# EAGLE board LP-LED-panelized (EAGLE 6.4)
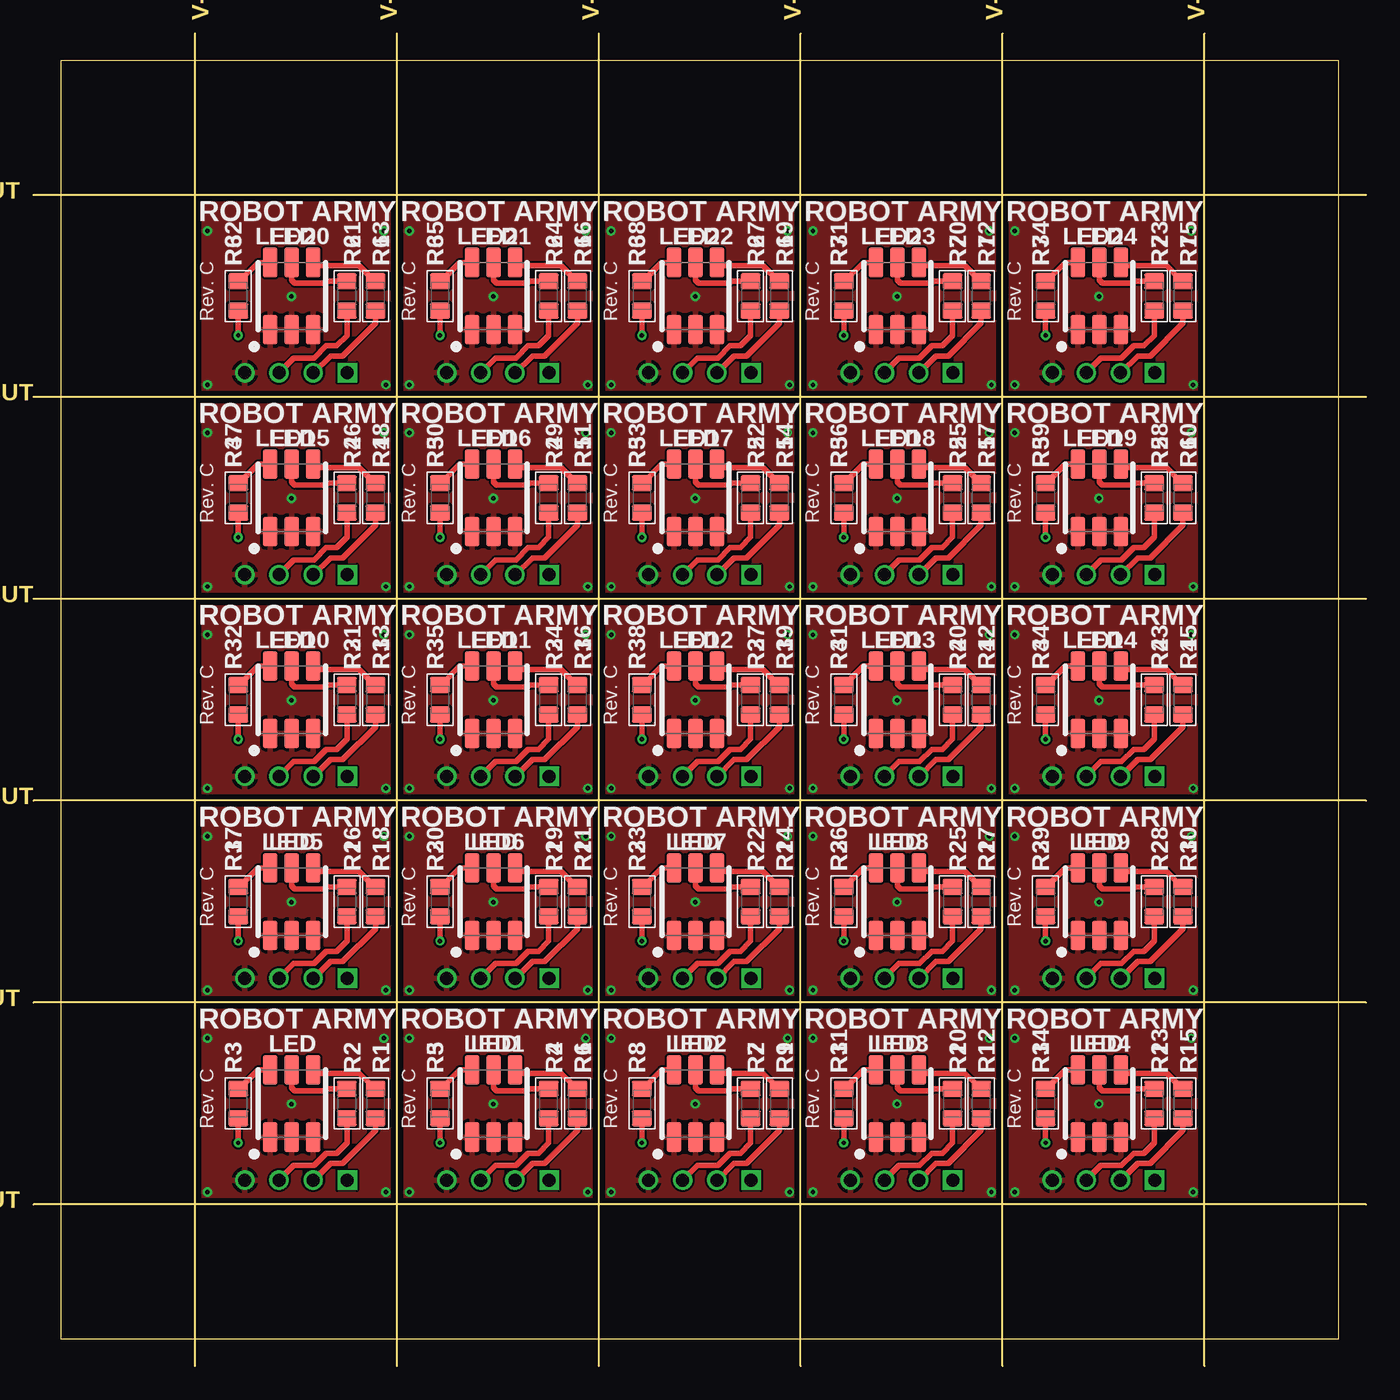
[diagram p0: board, top side]
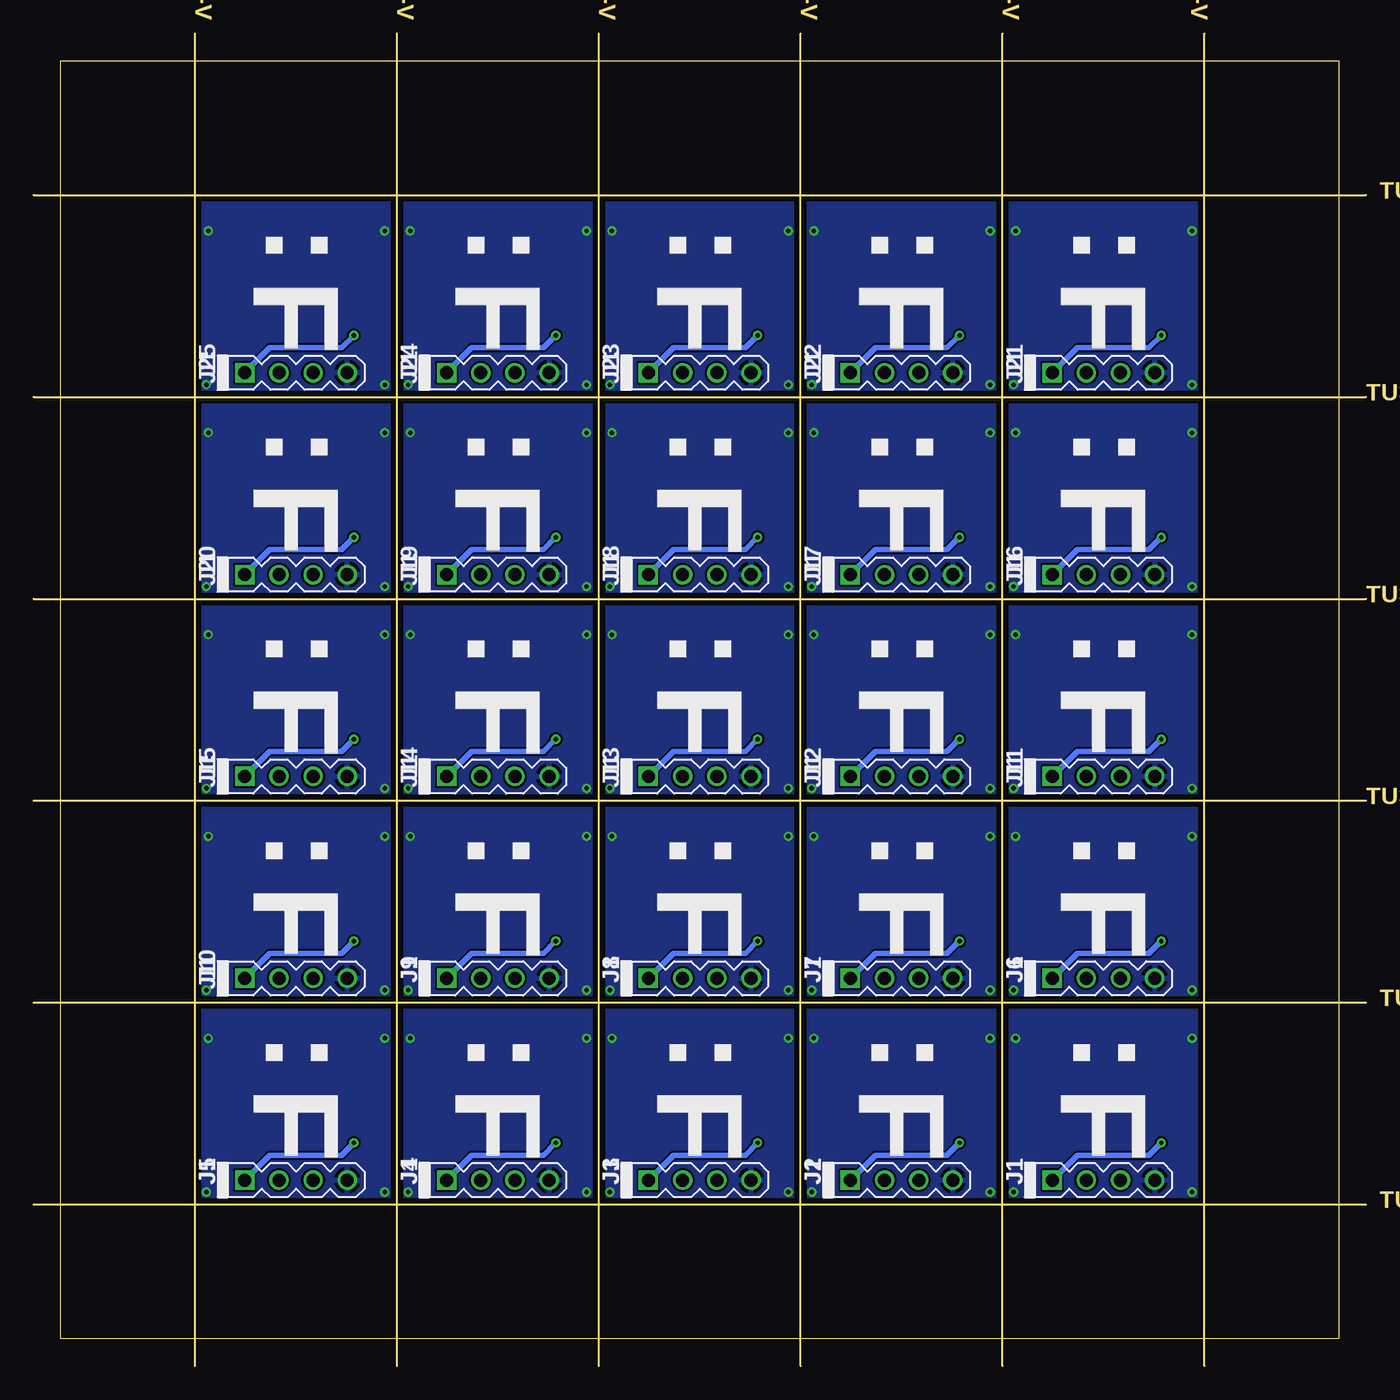
[diagram p1: board, bottom side, seen from below]

Size 99 x 99 mm. Coordinates in mm from the lower left corner, seen from the top.
Outline: 27,0 27,99
Outline: 42,0 42,99
Outline: 57,0 57,99
Outline: 72,0 72,99
Outline: 99,27 0,27
Outline: 99,42 0,42
Outline: 99,57 0,57
Outline: 99,72 0,72
Outline: 12,0 12,99
Outline: 87,0 87,99
Outline: 99,87 0,87
Outline: 99,12 0,12
Outline: 2,2 97,2 97,97 2,97 2,2
Copper layers (1*16): Top 0.0356mm / dielectric 1.5011mm / Bottom 0.0356mm
Design rules "OSH-CircuitMonkey": minimum track width 6mil, minimum drill 13mil, track to track 6mil, track to pad 6mil, pad to pad 6mil, via to via 6mil, smd to smd 6mil, copper to edge 15mil, drill to drill 6mil, minimum pad ring 7mil, minimum via ring 7mil, stop-mask expansion 3mil, vias tented up to drill 13mil, thermal gap 10mil

## Footprints (pad centres in the part's own frame; a part is rotated, then mirrored left to right if it is on the bottom)
MA04-1 = drill 0.965 square: 1 -3.81,0 | drill 0.965: 2 -1.27,0; 3 1.27,0; 4 3.81,0
PLCC-6 = smd 2.184 x 1.067: 1 -2.5,1.6; 2 -2.5,0; 3 -2.5,-1.6; 4 2.5,-1.6; 5 2.5,0; 6 2.5,1.6
0805 = smd 1.2 x 1.5: 1 -1.1,0; 2 1.1,0

## Placement (x,y rotation side)
J1  [MA04-1]  19.5,13.8 0 bottom
J2  [MA04-1]  34.5,13.8 0 bottom
J3  [MA04-1]  49.5,13.8 0 bottom
J4  [MA04-1]  64.5,13.8 0 bottom
J5  [MA04-1]  79.5,13.8 0 bottom
J6  [MA04-1]  19.5,28.8 0 bottom
J7  [MA04-1]  34.5,28.8 0 bottom
J8  [MA04-1]  49.5,28.8 0 bottom
J9  [MA04-1]  64.5,28.8 0 bottom
J10  [MA04-1]  79.5,28.8 0 bottom
J11  [MA04-1]  19.5,43.8 0 bottom
J12  [MA04-1]  34.5,43.8 0 bottom
J13  [MA04-1]  49.5,43.8 0 bottom
J14  [MA04-1]  64.5,43.8 0 bottom
J15  [MA04-1]  79.5,43.8 0 bottom
J16  [MA04-1]  19.5,58.8 0 bottom
J17  [MA04-1]  34.5,58.8 0 bottom
J18  [MA04-1]  49.5,58.8 0 bottom
J19  [MA04-1]  64.5,58.8 0 bottom
J20  [MA04-1]  79.5,58.8 0 bottom
J21  [MA04-1]  19.5,73.8 0 bottom
J22  [MA04-1]  34.5,73.8 0 bottom
J23  [MA04-1]  49.5,73.8 0 bottom
J24  [MA04-1]  64.5,73.8 0 bottom
J25  [MA04-1]  79.5,73.8 0 bottom
LED  [PLCC-6]  19.19,19.5 90 top
LED1  [PLCC-6]  34.19,19.5 90 top
LED2  [PLCC-6]  49.19,19.5 90 top
LED3  [PLCC-6]  64.19,19.5 90 top
LED4  [PLCC-6]  79.19,19.5 90 top
LED5  [PLCC-6]  19.19,34.5 90 top
LED6  [PLCC-6]  34.19,34.5 90 top
LED7  [PLCC-6]  49.19,34.5 90 top
LED8  [PLCC-6]  64.19,34.5 90 top
LED9  [PLCC-6]  79.19,34.5 90 top
LED10  [PLCC-6]  19.19,49.5 90 top
LED11  [PLCC-6]  34.19,49.5 90 top
LED12  [PLCC-6]  49.19,49.5 90 top
LED13  [PLCC-6]  64.19,49.5 90 top
LED14  [PLCC-6]  79.19,49.5 90 top
LED15  [PLCC-6]  19.19,64.5 90 top
LED16  [PLCC-6]  34.19,64.5 90 top
LED17  [PLCC-6]  49.19,64.5 90 top
LED18  [PLCC-6]  64.19,64.5 90 top
LED19  [PLCC-6]  79.19,64.5 90 top
LED20  [PLCC-6]  19.19,79.5 90 top
LED21  [PLCC-6]  34.19,79.5 90 top
LED22  [PLCC-6]  49.19,79.5 90 top
LED23  [PLCC-6]  64.19,79.5 90 top
LED24  [PLCC-6]  79.19,79.5 90 top
R1  133  [0805]  25.41,19.5 90 top
R2  200  [0805]  23.28,19.5 90 top
R3  133  [0805]  15.2,19.5 90 top
R4  200  [0805]  38.28,19.5 90 top
R5  133  [0805]  30.2,19.5 90 top
R6  133  [0805]  40.41,19.5 90 top
R7  200  [0805]  53.28,19.5 90 top
R8  133  [0805]  45.2,19.5 90 top
R9  133  [0805]  55.41,19.5 90 top
R10  200  [0805]  68.28,19.5 90 top
R11  133  [0805]  60.2,19.5 90 top
R12  133  [0805]  70.41,19.5 90 top
R13  200  [0805]  83.28,19.5 90 top
R14  133  [0805]  75.2,19.5 90 top
R15  133  [0805]  85.41,19.5 90 top
R16  200  [0805]  23.28,34.5 90 top
R17  133  [0805]  15.2,34.5 90 top
R18  133  [0805]  25.41,34.5 90 top
R19  200  [0805]  38.28,34.5 90 top
R20  133  [0805]  30.2,34.5 90 top
R21  133  [0805]  40.41,34.5 90 top
R22  200  [0805]  53.28,34.5 90 top
R23  133  [0805]  45.2,34.5 90 top
R24  133  [0805]  55.41,34.5 90 top
R25  200  [0805]  68.28,34.5 90 top
R26  133  [0805]  60.2,34.5 90 top
R27  133  [0805]  70.41,34.5 90 top
R28  200  [0805]  83.28,34.5 90 top
R29  133  [0805]  75.2,34.5 90 top
R30  133  [0805]  85.41,34.5 90 top
R31  200  [0805]  23.28,49.5 90 top
R32  133  [0805]  15.2,49.5 90 top
R33  133  [0805]  25.41,49.5 90 top
R34  200  [0805]  38.28,49.5 90 top
R35  133  [0805]  30.2,49.5 90 top
R36  133  [0805]  40.41,49.5 90 top
R37  200  [0805]  53.28,49.5 90 top
R38  133  [0805]  45.2,49.5 90 top
R39  133  [0805]  55.41,49.5 90 top
R40  200  [0805]  68.28,49.5 90 top
R41  133  [0805]  60.2,49.5 90 top
R42  133  [0805]  70.41,49.5 90 top
R43  200  [0805]  83.28,49.5 90 top
R44  133  [0805]  75.2,49.5 90 top
R45  133  [0805]  85.41,49.5 90 top
R46  200  [0805]  23.28,64.5 90 top
R47  133  [0805]  15.2,64.5 90 top
R48  133  [0805]  25.41,64.5 90 top
R49  200  [0805]  38.28,64.5 90 top
R50  133  [0805]  30.2,64.5 90 top
R51  133  [0805]  40.41,64.5 90 top
R52  200  [0805]  53.28,64.5 90 top
R53  133  [0805]  45.2,64.5 90 top
R54  133  [0805]  55.41,64.5 90 top
R55  200  [0805]  68.28,64.5 90 top
R56  133  [0805]  60.2,64.5 90 top
R57  133  [0805]  70.41,64.5 90 top
R58  200  [0805]  83.28,64.5 90 top
R59  133  [0805]  75.2,64.5 90 top
R60  133  [0805]  85.41,64.5 90 top
R61  200  [0805]  23.28,79.5 90 top
R62  133  [0805]  15.2,79.5 90 top
R63  133  [0805]  25.41,79.5 90 top
R64  200  [0805]  38.28,79.5 90 top
R65  133  [0805]  30.2,79.5 90 top
R66  133  [0805]  40.41,79.5 90 top
R67  200  [0805]  53.28,79.5 90 top
R68  133  [0805]  45.2,79.5 90 top
R69  133  [0805]  55.41,79.5 90 top
R70  200  [0805]  68.28,79.5 90 top
R71  133  [0805]  60.2,79.5 90 top
R72  133  [0805]  70.41,79.5 90 top
R73  200  [0805]  83.28,79.5 90 top
R74  133  [0805]  75.2,79.5 90 top
R75  133  [0805]  85.41,79.5 90 top

## Library data of the parts
J1-J25 = con-headers
LED LED1-LED24 = led
R1-R75 = rlc

## Nets
COMMON: J1.4 LED.1 LED.2 LED.3
COMMON1: J2.4 LED1.1 LED1.2 LED1.3
COMMON2: J3.4 LED2.1 LED2.2 LED2.3
COMMON3: J4.4 LED3.1 LED3.2 LED3.3
COMMON4: J5.4 LED4.1 LED4.2 LED4.3
COMMON5: J6.4 LED5.1 LED5.2 LED5.3
COMMON6: J7.4 LED6.1 LED6.2 LED6.3
COMMON7: J8.4 LED7.1 LED7.2 LED7.3
COMMON8: J9.4 LED8.1 LED8.2 LED8.3
COMMON9: J10.4 LED9.1 LED9.2 LED9.3
COMMON10: J11.4 LED10.1 LED10.2 LED10.3
COMMON11: J12.4 LED11.1 LED11.2 LED11.3
COMMON12: J13.4 LED12.1 LED12.2 LED12.3
COMMON13: J14.4 LED13.1 LED13.2 LED13.3
COMMON14: J15.4 LED14.1 LED14.2 LED14.3
COMMON15: J16.4 LED15.1 LED15.2 LED15.3
COMMON16: J17.4 LED16.1 LED16.2 LED16.3
COMMON17: J18.4 LED17.1 LED17.2 LED17.3
COMMON18: J19.4 LED18.1 LED18.2 LED18.3
COMMON19: J20.4 LED19.1 LED19.2 LED19.3
COMMON20: J21.4 LED20.1 LED20.2 LED20.3
COMMON21: J22.4 LED21.1 LED21.2 LED21.3
COMMON22: J23.4 LED22.1 LED22.2 LED22.3
COMMON23: J24.4 LED23.1 LED23.2 LED23.3
COMMON24: J25.4 LED24.1 LED24.2 LED24.3
N$1: LED.4 R1.2
N$2: J1.3 R2.1
N$3: LED.6 R3.2
N$4: LED.5 R2.2
N$5: J1.2 R1.1
N$6: J1.1 R3.1
N$7: LED1.6 R5.2
N$8: J2.1 R5.1
N$9: J2.2 R6.1
N$10: LED1.4 R6.2
N$11: J2.3 R4.1
N$12: LED1.5 R4.2
N$13: LED2.6 R8.2
N$14: J3.1 R8.1
N$15: J3.2 R9.1
N$16: LED2.4 R9.2
N$17: J3.3 R7.1
N$18: LED2.5 R7.2
N$19: LED3.6 R11.2
N$20: J4.1 R11.1
N$21: J4.2 R12.1
N$22: LED3.4 R12.2
N$23: J4.3 R10.1
N$24: LED3.5 R10.2
N$25: LED4.6 R14.2
N$26: J5.1 R14.1
N$27: J5.2 R15.1
N$28: LED4.4 R15.2
N$29: J5.3 R13.1
N$30: LED4.5 R13.2
N$31: LED5.6 R17.2
N$32: J6.1 R17.1
N$33: J6.2 R18.1
N$34: LED5.4 R18.2
N$35: J6.3 R16.1
N$36: LED5.5 R16.2
N$37: LED6.6 R20.2
N$38: J7.1 R20.1
N$39: J7.2 R21.1
N$40: LED6.4 R21.2
N$41: J7.3 R19.1
N$42: LED6.5 R19.2
N$43: LED7.6 R23.2
N$44: J8.1 R23.1
N$45: J8.2 R24.1
N$46: LED7.4 R24.2
N$47: J8.3 R22.1
N$48: LED7.5 R22.2
N$49: LED8.6 R26.2
N$50: J9.1 R26.1
N$51: J9.2 R27.1
N$52: LED8.4 R27.2
N$53: J9.3 R25.1
N$54: LED8.5 R25.2
N$55: LED9.6 R29.2
N$56: J10.1 R29.1
N$57: J10.2 R30.1
N$58: LED9.4 R30.2
N$59: J10.3 R28.1
N$60: LED9.5 R28.2
N$61: LED10.6 R32.2
N$62: J11.1 R32.1
N$63: J11.2 R33.1
N$64: LED10.4 R33.2
N$65: J11.3 R31.1
N$66: LED10.5 R31.2
N$67: LED11.6 R35.2
N$68: J12.1 R35.1
N$69: J12.2 R36.1
N$70: LED11.4 R36.2
N$71: J12.3 R34.1
N$72: LED11.5 R34.2
N$73: LED12.6 R38.2
N$74: J13.1 R38.1
N$75: J13.2 R39.1
N$76: LED12.4 R39.2
N$77: J13.3 R37.1
N$78: LED12.5 R37.2
N$79: LED13.6 R41.2
N$80: J14.1 R41.1
N$81: J14.2 R42.1
N$82: LED13.4 R42.2
N$83: J14.3 R40.1
N$84: LED13.5 R40.2
N$85: LED14.6 R44.2
N$86: J15.1 R44.1
N$87: J15.2 R45.1
N$88: LED14.4 R45.2
N$89: J15.3 R43.1
N$90: LED14.5 R43.2
N$91: LED15.6 R47.2
N$92: J16.1 R47.1
N$93: J16.2 R48.1
N$94: LED15.4 R48.2
N$95: J16.3 R46.1
N$96: LED15.5 R46.2
N$97: LED16.6 R50.2
N$98: J17.1 R50.1
N$99: J17.2 R51.1
N$100: LED16.4 R51.2
N$101: J17.3 R49.1
N$102: LED16.5 R49.2
N$103: LED17.6 R53.2
N$104: J18.1 R53.1
N$105: J18.2 R54.1
N$106: LED17.4 R54.2
N$107: J18.3 R52.1
N$108: LED17.5 R52.2
N$109: LED18.6 R56.2
N$110: J19.1 R56.1
N$111: J19.2 R57.1
N$112: LED18.4 R57.2
N$113: J19.3 R55.1
N$114: LED18.5 R55.2
N$115: LED19.6 R59.2
N$116: J20.1 R59.1
N$117: J20.2 R60.1
N$118: LED19.4 R60.2
N$119: J20.3 R58.1
N$120: LED19.5 R58.2
N$121: LED20.6 R62.2
N$122: J21.1 R62.1
N$123: J21.2 R63.1
N$124: LED20.4 R63.2
N$125: J21.3 R61.1
N$126: LED20.5 R61.2
N$127: LED21.6 R65.2
N$128: J22.1 R65.1
N$129: J22.2 R66.1
N$130: LED21.4 R66.2
N$131: J22.3 R64.1
N$132: LED21.5 R64.2
N$133: LED22.6 R68.2
N$134: J23.1 R68.1
N$135: J23.2 R69.1
N$136: LED22.4 R69.2
N$137: J23.3 R67.1
N$138: LED22.5 R67.2
N$139: LED23.6 R71.2
N$140: J24.1 R71.1
N$141: J24.2 R72.1
N$142: LED23.4 R72.2
N$143: J24.3 R70.1
N$144: LED23.5 R70.2
N$145: LED24.6 R74.2
N$146: J25.1 R74.1
N$147: J25.2 R75.1
N$148: LED24.4 R75.2
N$149: J25.3 R73.1
N$150: LED24.5 R73.2

## Tracks (layer width: path | path; a pad name or v marks a point on that pad's centre or on a via)
COMMON  (via drill 0.33)
  other vias: 12.91,24.34 26.02,24.34 12.91,12.91 26.17,12.91 19.16,19.47
  pour Bottom: 12,27 27,27 27,12 12,12
  pour Top: 12,27 27,27 27,12 12,12
COMMON1  (via drill 0.33)
  other vias: 27.91,24.34 41.02,24.34 27.91,12.91 41.17,12.91 34.16,19.47
  pour Bottom: 27,27 42,27 42,12 27,12
  pour Top: 27,27 42,27 42,12 27,12
COMMON2  (via drill 0.33)
  other vias: 42.91,24.34 56.02,24.34 42.91,12.91 56.17,12.91 49.16,19.47
  pour Bottom: 42,27 57,27 57,12 42,12
  pour Top: 42,27 57,27 57,12 42,12
COMMON3  (via drill 0.33)
  other vias: 57.91,24.34 71.02,24.34 57.91,12.91 71.17,12.91 64.16,19.47
  pour Bottom: 57,27 72,27 72,12 57,12
  pour Top: 57,27 72,27 72,12 57,12
COMMON4  (via drill 0.33)
  other vias: 72.91,24.34 86.02,24.34 72.91,12.91 86.17,12.91 79.16,19.47
  pour Bottom: 72,27 87,27 87,12 72,12
  pour Top: 72,27 87,27 87,12 72,12
COMMON5  (via drill 0.33)
  other vias: 12.91,39.34 26.02,39.34 12.91,27.91 26.17,27.91 19.16,34.47
  pour Bottom: 12,42 27,42 27,27 12,27
  pour Top: 12,42 27,42 27,27 12,27
COMMON6  (via drill 0.33)
  other vias: 27.91,39.34 41.02,39.34 27.91,27.91 41.17,27.91 34.16,34.47
  pour Bottom: 27,42 42,42 42,27 27,27
  pour Top: 27,42 42,42 42,27 27,27
COMMON7  (via drill 0.33)
  other vias: 42.91,39.34 56.02,39.34 42.91,27.91 56.17,27.91 49.16,34.47
  pour Bottom: 42,42 57,42 57,27 42,27
  pour Top: 42,42 57,42 57,27 42,27
COMMON8  (via drill 0.33)
  other vias: 57.91,39.34 71.02,39.34 57.91,27.91 71.17,27.91 64.16,34.47
  pour Bottom: 57,42 72,42 72,27 57,27
  pour Top: 57,42 72,42 72,27 57,27
COMMON9  (via drill 0.33)
  other vias: 72.91,39.34 86.02,39.34 72.91,27.91 86.17,27.91 79.16,34.47
  pour Bottom: 72,42 87,42 87,27 72,27
  pour Top: 72,42 87,42 87,27 72,27
COMMON10  (via drill 0.33)
  other vias: 12.91,54.34 26.02,54.34 12.91,42.91 26.17,42.91 19.16,49.47
  pour Bottom: 12,57 27,57 27,42 12,42
  pour Top: 12,57 27,57 27,42 12,42
COMMON11  (via drill 0.33)
  other vias: 27.91,54.34 41.02,54.34 27.91,42.91 41.17,42.91 34.16,49.47
  pour Bottom: 27,57 42,57 42,42 27,42
  pour Top: 27,57 42,57 42,42 27,42
COMMON12  (via drill 0.33)
  other vias: 42.91,54.34 56.02,54.34 42.91,42.91 56.17,42.91 49.16,49.47
  pour Bottom: 42,57 57,57 57,42 42,42
  pour Top: 42,57 57,57 57,42 42,42
COMMON13  (via drill 0.33)
  other vias: 57.91,54.34 71.02,54.34 57.91,42.91 71.17,42.91 64.16,49.47
  pour Bottom: 57,57 72,57 72,42 57,42
  pour Top: 57,57 72,57 72,42 57,42
COMMON14  (via drill 0.33)
  other vias: 72.91,54.34 86.02,54.34 72.91,42.91 86.17,42.91 79.16,49.47
  pour Bottom: 72,57 87,57 87,42 72,42
  pour Top: 72,57 87,57 87,42 72,42
COMMON15  (via drill 0.33)
  other vias: 12.91,69.34 26.02,69.34 12.91,57.91 26.17,57.91 19.16,64.47
  pour Bottom: 12,72 27,72 27,57 12,57
  pour Top: 12,72 27,72 27,57 12,57
COMMON16  (via drill 0.33)
  other vias: 27.91,69.34 41.02,69.34 27.91,57.91 41.17,57.91 34.16,64.47
  pour Bottom: 27,72 42,72 42,57 27,57
  pour Top: 27,72 42,72 42,57 27,57
COMMON17  (via drill 0.33)
  other vias: 42.91,69.34 56.02,69.34 42.91,57.91 56.17,57.91 49.16,64.47
  pour Bottom: 42,72 57,72 57,57 42,57
  pour Top: 42,72 57,72 57,57 42,57
COMMON18  (via drill 0.33)
  other vias: 57.91,69.34 71.02,69.34 57.91,57.91 71.17,57.91 64.16,64.47
  pour Bottom: 57,72 72,72 72,57 57,57
  pour Top: 57,72 72,72 72,57 57,57
COMMON19  (via drill 0.33)
  other vias: 72.91,69.34 86.02,69.34 72.91,57.91 86.17,57.91 79.16,64.47
  pour Bottom: 72,72 87,72 87,57 72,57
  pour Top: 72,72 87,72 87,57 72,57
COMMON20  (via drill 0.33)
  other vias: 12.91,84.34 26.02,84.34 12.91,72.91 26.17,72.91 19.16,79.47
  pour Bottom: 12,87 27,87 27,72 12,72
  pour Top: 12,87 27,87 27,72 12,72
COMMON21  (via drill 0.33)
  other vias: 27.91,84.34 41.02,84.34 27.91,72.91 41.17,72.91 34.16,79.47
  pour Bottom: 27,87 42,87 42,72 27,72
  pour Top: 27,87 42,87 42,72 27,72
COMMON22  (via drill 0.33)
  other vias: 42.91,84.34 56.02,84.34 42.91,72.91 56.17,72.91 49.16,79.47
  pour Bottom: 42,87 57,87 57,72 42,72
  pour Top: 42,87 57,87 57,72 42,72
COMMON23  (via drill 0.33)
  other vias: 57.91,84.34 71.02,84.34 57.91,72.91 71.17,72.91 64.16,79.47
  pour Bottom: 57,87 72,87 72,72 57,72
  pour Top: 57,87 72,87 72,72 57,72
COMMON24  (via drill 0.33)
  other vias: 72.91,84.34 86.02,84.34 72.91,72.91 86.17,72.91 79.16,79.47
  pour Bottom: 72,87 87,87 87,72 72,72
  pour Top: 72,87 87,87 87,72 72,72
N$1
  Top 0.406: R1.2 25.19,20.45 25.19,20.75 24.19,21.75 21.03,21.75 LED.4
N$2
  Top 0.406: J1.3 19.32,14.9 20.84,14.9 21.75,15.81 22.52,15.81 23.28,16.57 R2.1
N$3
  Top 0.406: R3.2 15.27,20.6 16.67,22 LED.6
N$4
  Top 0.406: LED.5 19.18,20.66 19.4,20.45 21.67,20.45 21.75,20.53 21.82,20.6 R2.2
N$5
  Top 0.406: J1.2 20.81,13.8 22.06,15.05 22.97,15.05 25.41,17.49 R1.1
N$6  (via drill 0.33)
  Top 0.406: v15.2,16.57 R3.1
  Bottom 0.406: J1.1 21.45,15.66 16.12,15.66 v15.2,16.57
N$7
  Top 0.406: R5.2 30.27,20.6 31.67,22 LED1.6
N$8  (via drill 0.33)
  Top 0.406: v30.2,16.57 R5.1
  Bottom 0.406: J2.1 36.45,15.66 31.11,15.66 v30.2,16.57
N$9
  Top 0.406: J2.2 35.81,13.8 37.06,15.05 37.97,15.05 40.41,17.49 R6.1
N$10
  Top 0.406: R6.2 40.19,20.45 40.19,20.75 39.19,21.75 36.03,21.75 LED1.4
N$11
  Top 0.406: J2.3 34.31,14.9 35.84,14.9 36.75,15.81 37.52,15.81 38.28,16.57 R4.1
N$12
  Top 0.406: LED1.5 34.19,20.66 34.4,20.45 36.67,20.45 36.75,20.53 36.82,20.6 R4.2
N$13
  Top 0.406: R8.2 45.27,20.6 46.67,22 LED2.6
N$14  (via drill 0.33)
  Top 0.406: v45.2,16.57 R8.1
  Bottom 0.406: J3.1 51.45,15.66 46.12,15.66 v45.2,16.57
N$15
  Top 0.406: J3.2 50.81,13.8 52.06,15.05 52.97,15.05 55.41,17.49 R9.1
N$16
  Top 0.406: R9.2 55.19,20.45 55.19,20.75 54.19,21.75 51.03,21.75 LED2.4
N$17
  Top 0.406: J3.3 49.31,14.9 50.84,14.9 51.75,15.81 52.52,15.81 53.28,16.57 R7.1
N$18
  Top 0.406: LED2.5 49.19,20.66 49.4,20.45 51.67,20.45 51.75,20.53 51.82,20.6 R7.2
N$19
  Top 0.406: R11.2 60.27,20.6 61.67,22 LED3.6
N$20  (via drill 0.33)
  Top 0.406: v60.2,16.57 R11.1
  Bottom 0.406: J4.1 66.45,15.66 61.12,15.66 v60.2,16.57
N$21
  Top 0.406: J4.2 65.81,13.8 67.06,15.05 67.97,15.05 70.41,17.49 R12.1
N$22
  Top 0.406: R12.2 70.19,20.45 70.19,20.75 69.19,21.75 66.03,21.75 LED3.4
N$23
  Top 0.406: J4.3 64.31,14.9 65.84,14.9 66.75,15.81 67.52,15.81 68.28,16.57 R10.1
N$24
  Top 0.406: LED3.5 64.19,20.66 64.4,20.45 66.67,20.45 66.75,20.53 66.82,20.6 R10.2
N$25
  Top 0.406: R14.2 75.27,20.6 76.67,22 LED4.6
N$26  (via drill 0.33)
  Top 0.406: v75.2,16.57 R14.1
  Bottom 0.406: J5.1 81.45,15.66 76.11,15.66 v75.2,16.57
N$27
  Top 0.406: J5.2 80.81,13.8 82.06,15.05 82.97,15.05 85.41,17.49 R15.1
N$28
  Top 0.406: R15.2 85.19,20.45 85.19,20.75 84.19,21.75 81.03,21.75 LED4.4
N$29
  Top 0.406: J5.3 79.31,14.9 80.84,14.9 81.75,15.81 82.52,15.81 83.28,16.57 R13.1
N$30
  Top 0.406: LED4.5 79.19,20.66 79.4,20.45 81.67,20.45 81.75,20.53 81.82,20.6 R13.2
N$31
  Top 0.406: R17.2 15.27,35.6 16.67,37 LED5.6
N$32  (via drill 0.33)
  Top 0.406: v15.2,31.57 R17.1
  Bottom 0.406: J6.1 21.45,30.66 16.12,30.66 v15.2,31.57
N$33
  Top 0.406: J6.2 20.81,28.8 22.06,30.05 22.97,30.05 25.41,32.49 R18.1
N$34
  Top 0.406: R18.2 25.19,35.45 25.19,35.75 24.19,36.75 21.03,36.75 LED5.4
N$35
  Top 0.406: J6.3 19.32,29.9 20.84,29.9 21.75,30.81 22.52,30.81 23.28,31.57 R16.1
N$36
  Top 0.406: LED5.5 19.18,35.66 19.4,35.45 21.67,35.45 21.75,35.53 21.82,35.6 R16.2
N$37
  Top 0.406: R20.2 30.27,35.6 31.67,37 LED6.6
N$38  (via drill 0.33)
  Top 0.406: v30.2,31.57 R20.1
  Bottom 0.406: J7.1 36.45,30.66 31.11,30.66 v30.2,31.57
N$39
  Top 0.406: J7.2 35.81,28.8 37.06,30.05 37.97,30.05 40.41,32.49 R21.1
N$40
  Top 0.406: R21.2 40.19,35.45 40.19,35.75 39.19,36.75 36.03,36.75 LED6.4
N$41
  Top 0.406: J7.3 34.31,29.9 35.84,29.9 36.75,30.81 37.52,30.81 38.28,31.57 R19.1
N$42
  Top 0.406: LED6.5 34.19,35.66 34.4,35.45 36.67,35.45 36.75,35.53 36.82,35.6 R19.2
N$43
  Top 0.406: R23.2 45.27,35.6 46.67,37 LED7.6
N$44  (via drill 0.33)
  Top 0.406: v45.2,31.57 R23.1
  Bottom 0.406: J8.1 51.45,30.66 46.12,30.66 v45.2,31.57
N$45
  Top 0.406: J8.2 50.81,28.8 52.06,30.05 52.97,30.05 55.41,32.49 R24.1
N$46
  Top 0.406: R24.2 55.19,35.45 55.19,35.75 54.19,36.75 51.03,36.75 LED7.4
N$47
  Top 0.406: J8.3 49.31,29.9 50.84,29.9 51.75,30.81 52.52,30.81 53.28,31.57 R22.1
N$48
  Top 0.406: LED7.5 49.19,35.66 49.4,35.45 51.67,35.45 51.75,35.53 51.82,35.6 R22.2
N$49
  Top 0.406: R26.2 60.27,35.6 61.67,37 LED8.6
N$50  (via drill 0.33)
  Top 0.406: v60.2,31.57 R26.1
  Bottom 0.406: J9.1 66.45,30.66 61.12,30.66 v60.2,31.57
N$51
  Top 0.406: J9.2 65.81,28.8 67.06,30.05 67.97,30.05 70.41,32.49 R27.1
N$52
  Top 0.406: R27.2 70.19,35.45 70.19,35.75 69.19,36.75 66.03,36.75 LED8.4
N$53
  Top 0.406: J9.3 64.31,29.9 65.84,29.9 66.75,30.81 67.52,30.81 68.28,31.57 R25.1
N$54
  Top 0.406: LED8.5 64.19,35.66 64.4,35.45 66.67,35.45 66.75,35.53 66.82,35.6 R25.2
N$55
  Top 0.406: R29.2 75.27,35.6 76.67,37 LED9.6
N$56  (via drill 0.33)
  Top 0.406: v75.2,31.57 R29.1
  Bottom 0.406: J10.1 81.45,30.66 76.11,30.66 v75.2,31.57
N$57
  Top 0.406: J10.2 80.81,28.8 82.06,30.05 82.97,30.05 85.41,32.49 R30.1
N$58
  Top 0.406: R30.2 85.19,35.45 85.19,35.75 84.19,36.75 81.03,36.75 LED9.4
N$59
  Top 0.406: J10.3 79.31,29.9 80.84,29.9 81.75,30.81 82.52,30.81 83.28,31.57 R28.1
N$60
  Top 0.406: LED9.5 79.19,35.66 79.4,35.45 81.67,35.45 81.75,35.53 81.82,35.6 R28.2
N$61
  Top 0.406: R32.2 15.27,50.6 16.67,52 LED10.6
N$62  (via drill 0.33)
  Top 0.406: v15.2,46.57 R32.1
  Bottom 0.406: J11.1 21.45,45.66 16.12,45.66 v15.2,46.57
N$63
  Top 0.406: J11.2 20.81,43.8 22.06,45.05 22.97,45.05 25.41,47.49 R33.1
N$64
  Top 0.406: R33.2 25.19,50.45 25.19,50.75 24.19,51.75 21.03,51.75 LED10.4
N$65
  Top 0.406: J11.3 19.32,44.9 20.84,44.9 21.75,45.81 22.52,45.81 23.28,46.57 R31.1
N$66
  Top 0.406: LED10.5 19.18,50.66 19.4,50.45 21.67,50.45 21.75,50.53 21.82,50.6 R31.2
N$67
  Top 0.406: R35.2 30.27,50.6 31.67,52 LED11.6
N$68  (via drill 0.33)
  Top 0.406: v30.2,46.57 R35.1
  Bottom 0.406: J12.1 36.45,45.66 31.11,45.66 v30.2,46.57
N$69
  Top 0.406: J12.2 35.81,43.8 37.06,45.05 37.97,45.05 40.41,47.49 R36.1
N$70
  Top 0.406: R36.2 40.19,50.45 40.19,50.75 39.19,51.75 36.03,51.75 LED11.4
N$71
  Top 0.406: J12.3 34.31,44.9 35.84,44.9 36.75,45.81 37.52,45.81 38.28,46.57 R34.1
N$72
  Top 0.406: LED11.5 34.19,50.66 34.4,50.45 36.67,50.45 36.75,50.53 36.82,50.6 R34.2
N$73
  Top 0.406: R38.2 45.27,50.6 46.67,52 LED12.6
N$74  (via drill 0.33)
  Top 0.406: v45.2,46.57 R38.1
  Bottom 0.406: J13.1 51.45,45.66 46.12,45.66 v45.2,46.57
N$75
  Top 0.406: J13.2 50.81,43.8 52.06,45.05 52.97,45.05 55.41,47.49 R39.1
N$76
  Top 0.406: R39.2 55.19,50.45 55.19,50.75 54.19,51.75 51.03,51.75 LED12.4
N$77
  Top 0.406: J13.3 49.31,44.9 50.84,44.9 51.75,45.81 52.52,45.81 53.28,46.57 R37.1
N$78
  Top 0.406: LED12.5 49.19,50.66 49.4,50.45 51.67,50.45 51.75,50.53 51.82,50.6 R37.2
N$79
  Top 0.406: R41.2 60.27,50.6 61.67,52 LED13.6
N$80  (via drill 0.33)
  Top 0.406: v60.2,46.57 R41.1
  Bottom 0.406: J14.1 66.45,45.66 61.12,45.66 v60.2,46.57
N$81
  Top 0.406: J14.2 65.81,43.8 67.06,45.05 67.97,45.05 70.41,47.49 R42.1
N$82
  Top 0.406: R42.2 70.19,50.45 70.19,50.75 69.19,51.75 66.03,51.75 LED13.4
N$83
  Top 0.406: J14.3 64.31,44.9 65.84,44.9 66.75,45.81 67.52,45.81 68.28,46.57 R40.1
N$84
  Top 0.406: LED13.5 64.19,50.66 64.4,50.45 66.67,50.45 66.75,50.53 66.82,50.6 R40.2
N$85
  Top 0.406: R44.2 75.27,50.6 76.67,52 LED14.6
N$86  (via drill 0.33)
  Top 0.406: v75.2,46.57 R44.1
  Bottom 0.406: J15.1 81.45,45.66 76.11,45.66 v75.2,46.57
N$87
  Top 0.406: J15.2 80.81,43.8 82.06,45.05 82.97,45.05 85.41,47.49 R45.1
N$88
  Top 0.406: R45.2 85.19,50.45 85.19,50.75 84.19,51.75 81.03,51.75 LED14.4
N$89
  Top 0.406: J15.3 79.31,44.9 80.84,44.9 81.75,45.81 82.52,45.81 83.28,46.57 R43.1
N$90
  Top 0.406: LED14.5 79.19,50.66 79.4,50.45 81.67,50.45 81.75,50.53 81.82,50.6 R43.2
N$91
  Top 0.406: R47.2 15.27,65.6 16.67,67 LED15.6
N$92  (via drill 0.33)
  Top 0.406: v15.2,61.57 R47.1
  Bottom 0.406: J16.1 21.45,60.66 16.12,60.66 v15.2,61.57
N$93
  Top 0.406: J16.2 20.81,58.8 22.06,60.05 22.97,60.05 25.41,62.49 R48.1
N$94
  Top 0.406: R48.2 25.19,65.45 25.19,65.75 24.19,66.75 21.03,66.75 LED15.4
N$95
  Top 0.406: J16.3 19.32,59.9 20.84,59.9 21.75,60.81 22.52,60.81 23.28,61.57 R46.1
N$96
  Top 0.406: LED15.5 19.18,65.66 19.4,65.45 21.67,65.45 21.75,65.53 21.82,65.6 R46.2
N$97
  Top 0.406: R50.2 30.27,65.6 31.67,67 LED16.6
N$98  (via drill 0.33)
  Top 0.406: v30.2,61.57 R50.1
  Bottom 0.406: J17.1 36.45,60.66 31.11,60.66 v30.2,61.57
N$99
  Top 0.406: J17.2 35.81,58.8 37.06,60.05 37.97,60.05 40.41,62.49 R51.1
N$100
  Top 0.406: R51.2 40.19,65.45 40.19,65.75 39.19,66.75 36.03,66.75 LED16.4
N$101
  Top 0.406: J17.3 34.31,59.9 35.84,59.9 36.75,60.81 37.52,60.81 38.28,61.57 R49.1
N$102
  Top 0.406: LED16.5 34.19,65.66 34.4,65.45 36.67,65.45 36.75,65.53 36.82,65.6 R49.2
N$103
  Top 0.406: R53.2 45.27,65.6 46.67,67 LED17.6
N$104  (via drill 0.33)
  Top 0.406: v45.2,61.57 R53.1
  Bottom 0.406: J18.1 51.45,60.66 46.12,60.66 v45.2,61.57
N$105
  Top 0.406: J18.2 50.81,58.8 52.06,60.05 52.97,60.05 55.41,62.49 R54.1
N$106
  Top 0.406: R54.2 55.19,65.45 55.19,65.75 54.19,66.75 51.03,66.75 LED17.4
N$107
  Top 0.406: J18.3 49.31,59.9 50.84,59.9 51.75,60.81 52.52,60.81 53.28,61.57 R52.1
N$108
  Top 0.406: LED17.5 49.19,65.66 49.4,65.45 51.67,65.45 51.75,65.53 51.82,65.6 R52.2
N$109
  Top 0.406: R56.2 60.27,65.6 61.67,67 LED18.6
N$110  (via drill 0.33)
  Top 0.406: v60.2,61.57 R56.1
  Bottom 0.406: J19.1 66.45,60.66 61.12,60.66 v60.2,61.57
N$111
  Top 0.406: J19.2 65.81,58.8 67.06,60.05 67.97,60.05 70.41,62.49 R57.1
N$112
  Top 0.406: R57.2 70.19,65.45 70.19,65.75 69.19,66.75 66.03,66.75 LED18.4
N$113
  Top 0.406: J19.3 64.31,59.9 65.84,59.9 66.75,60.81 67.52,60.81 68.28,61.57 R55.1
N$114
  Top 0.406: LED18.5 64.19,65.66 64.4,65.45 66.67,65.45 66.75,65.53 66.82,65.6 R55.2
N$115
  Top 0.406: R59.2 75.27,65.6 76.67,67 LED19.6
N$116  (via drill 0.33)
  Top 0.406: v75.2,61.57 R59.1
  Bottom 0.406: J20.1 81.45,60.66 76.11,60.66 v75.2,61.57
N$117
  Top 0.406: J20.2 80.81,58.8 82.06,60.05 82.97,60.05 85.41,62.49 R60.1
N$118
  Top 0.406: R60.2 85.19,65.45 85.19,65.75 84.19,66.75 81.03,66.75 LED19.4
N$119
  Top 0.406: J20.3 79.31,59.9 80.84,59.9 81.75,60.81 82.52,60.81 83.28,61.57 R58.1
N$120
  Top 0.406: LED19.5 79.19,65.66 79.4,65.45 81.67,65.45 81.75,65.53 81.82,65.6 R58.2
N$121
  Top 0.406: R62.2 15.27,80.6 16.67,82 LED20.6
N$122  (via drill 0.33)
  Top 0.406: v15.2,76.57 R62.1
  Bottom 0.406: J21.1 21.45,75.66 16.12,75.66 v15.2,76.57
N$123
  Top 0.406: J21.2 20.81,73.8 22.06,75.05 22.97,75.05 25.41,77.49 R63.1
N$124
  Top 0.406: R63.2 25.19,80.45 25.19,80.75 24.19,81.75 21.03,81.75 LED20.4
N$125
  Top 0.406: J21.3 19.32,74.9 20.84,74.9 21.75,75.81 22.52,75.81 23.28,76.57 R61.1
N$126
  Top 0.406: LED20.5 19.18,80.66 19.4,80.45 21.67,80.45 21.75,80.53 21.82,80.6 R61.2
N$127
  Top 0.406: R65.2 30.27,80.6 31.67,82 LED21.6
N$128  (via drill 0.33)
  Top 0.406: v30.2,76.57 R65.1
  Bottom 0.406: J22.1 36.45,75.66 31.11,75.66 v30.2,76.57
N$129
  Top 0.406: J22.2 35.81,73.8 37.06,75.05 37.97,75.05 40.41,77.49 R66.1
N$130
  Top 0.406: R66.2 40.19,80.45 40.19,80.75 39.19,81.75 36.03,81.75 LED21.4
N$131
  Top 0.406: J22.3 34.31,74.9 35.84,74.9 36.75,75.81 37.52,75.81 38.28,76.57 R64.1
N$132
  Top 0.406: LED21.5 34.19,80.66 34.4,80.45 36.67,80.45 36.75,80.53 36.82,80.6 R64.2
N$133
  Top 0.406: R68.2 45.27,80.6 46.67,82 LED22.6
N$134  (via drill 0.33)
  Top 0.406: v45.2,76.57 R68.1
  Bottom 0.406: J23.1 51.45,75.66 46.12,75.66 v45.2,76.57
N$135
  Top 0.406: J23.2 50.81,73.8 52.06,75.05 52.97,75.05 55.41,77.49 R69.1
N$136
  Top 0.406: R69.2 55.19,80.45 55.19,80.75 54.19,81.75 51.03,81.75 LED22.4
N$137
  Top 0.406: J23.3 49.31,74.9 50.84,74.9 51.75,75.81 52.52,75.81 53.28,76.57 R67.1
N$138
  Top 0.406: LED22.5 49.19,80.66 49.4,80.45 51.67,80.45 51.75,80.53 51.82,80.6 R67.2
N$139
  Top 0.406: R71.2 60.27,80.6 61.67,82 LED23.6
N$140  (via drill 0.33)
  Top 0.406: v60.2,76.57 R71.1
  Bottom 0.406: J24.1 66.45,75.66 61.12,75.66 v60.2,76.57
N$141
  Top 0.406: J24.2 65.81,73.8 67.06,75.05 67.97,75.05 70.41,77.49 R72.1
N$142
  Top 0.406: R72.2 70.19,80.45 70.19,80.75 69.19,81.75 66.03,81.75 LED23.4
N$143
  Top 0.406: J24.3 64.31,74.9 65.84,74.9 66.75,75.81 67.52,75.81 68.28,76.57 R70.1
N$144
  Top 0.406: LED23.5 64.19,80.66 64.4,80.45 66.67,80.45 66.75,80.53 66.82,80.6 R70.2
N$145
  Top 0.406: R74.2 75.27,80.6 76.67,82 LED24.6
N$146  (via drill 0.33)
  Top 0.406: v75.2,76.57 R74.1
  Bottom 0.406: J25.1 81.45,75.66 76.11,75.66 v75.2,76.57
N$147
  Top 0.406: J25.2 80.81,73.8 82.06,75.05 82.97,75.05 85.41,77.49 R75.1
N$148
  Top 0.406: R75.2 85.19,80.45 85.19,80.75 84.19,81.75 81.03,81.75 LED24.4
N$149
  Top 0.406: J25.3 79.31,74.9 80.84,74.9 81.75,75.81 82.52,75.81 83.28,76.57 R73.1
N$150
  Top 0.406: LED24.5 79.19,80.66 79.4,80.45 81.67,80.45 81.75,80.53 81.82,80.6 R73.2

## Text on the board
Dimension: V-CUT | V-CUT | V-CUT | V-CUT | V-CUT | V-CUT | V-CUT | V-CUT | V-CUT | V-CUT | V-CUT | V-CUT
tPlace: ROBOT ARMY | ROBOT ARMY | ROBOT ARMY | ROBOT ARMY | ROBOT ARMY | Rev. C | Rev. C | Rev. C | Rev. C | Rev. C | ROBOT ARMY | ROBOT ARMY | ROBOT ARMY | ROBOT ARMY | ROBOT ARMY | Rev. C | Rev. C | Rev. C | Rev. C | Rev. C | ROBOT ARMY | ROBOT ARMY | ROBOT ARMY | ROBOT ARMY | ROBOT ARMY | Rev. C | Rev. C | Rev. C | Rev. C | Rev. C | ROBOT ARMY | ROBOT ARMY | ROBOT ARMY | ROBOT ARMY | ROBOT ARMY | Rev. C | Rev. C | Rev. C | Rev. C | Rev. C | ROBOT ARMY | ROBOT ARMY | ROBOT ARMY | ROBOT ARMY | ROBOT ARMY | Rev. C | Rev. C | Rev. C | Rev. C | Rev. C
bPlace: : | : | : | : | : | F | F | F | F | F | : | : | : | : | : | F | F | F | F | F | : | : | : | : | : | F | F | F | F | F | : | : | : | : | : | F | F | F | F | F | : | : | : | : | : | F | F | F | F | F
_tNames: LED | LED | LED | LED | LED | R3 | R2 | R1 | R3 | R2 | R1 | R3 | R2 | R1 | R3 | R2 | R1 | R3 | R2 | R1 | LED | LED | LED | LED | LED | R3 | R2 | R1 | R3 | R2 | R1 | R3 | R2 | R1 | R3 | R2 | R1 | R3 | R2 | R1 | LED | LED | LED | LED | LED | R3 | R2 | R1 | R3 | R2 | R1 | R3 | R2 | R1 | R3 | R2 | R1 | R3 | R2 | R1 | LED | LED | LED | LED | LED | R3 | R2 | R1 | R3 | R2 | R1 | R3 | R2 | R1 | R3 | R2 | R1 | R3 | R2 | R1 | LED | LED | LED | LED | LED | R3 | R2 | R1 | R3 | R2 | R1 | R3 | R2 | R1 | R3 | R2 | R1 | R3 | R2 | R1
_bNames: J1 | J1 | J1 | J1 | J1 | J1 | J1 | J1 | J1 | J1 | J1 | J1 | J1 | J1 | J1 | J1 | J1 | J1 | J1 | J1 | J1 | J1 | J1 | J1 | J1